# Altium PCB Mixer.PCBDOC
Units mil, origin at the board's own origin, x right, y up, seen from the top; angles counter-clockwise.
Board outline 8000 x 4000 mil, 2 copper layers (Top Layer, Bottom Layer); 97 components, 57 nets, 281 pads, 0 vias.
Unrouted connection lines stored in the file: 187.
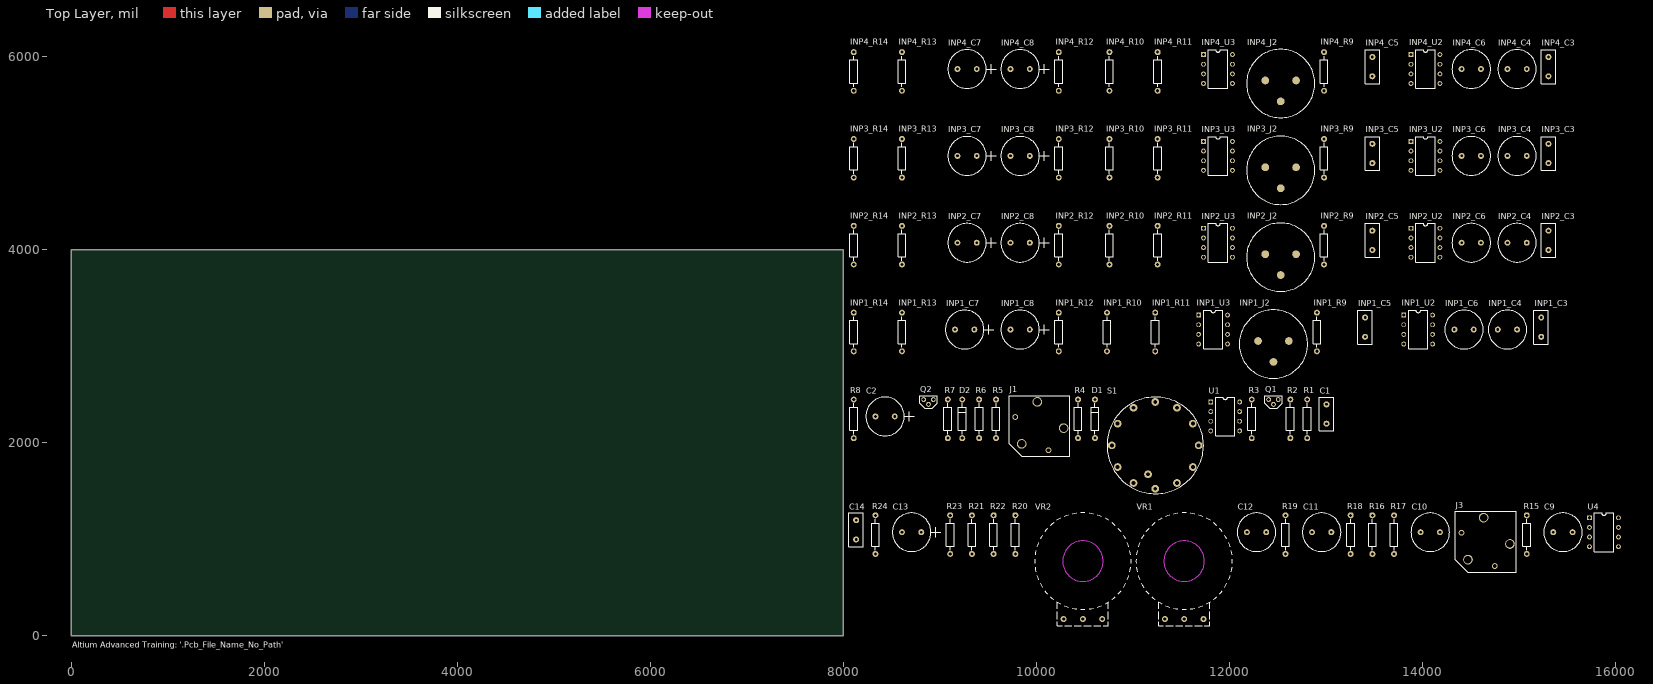
[diagram p0: Top Layer view]
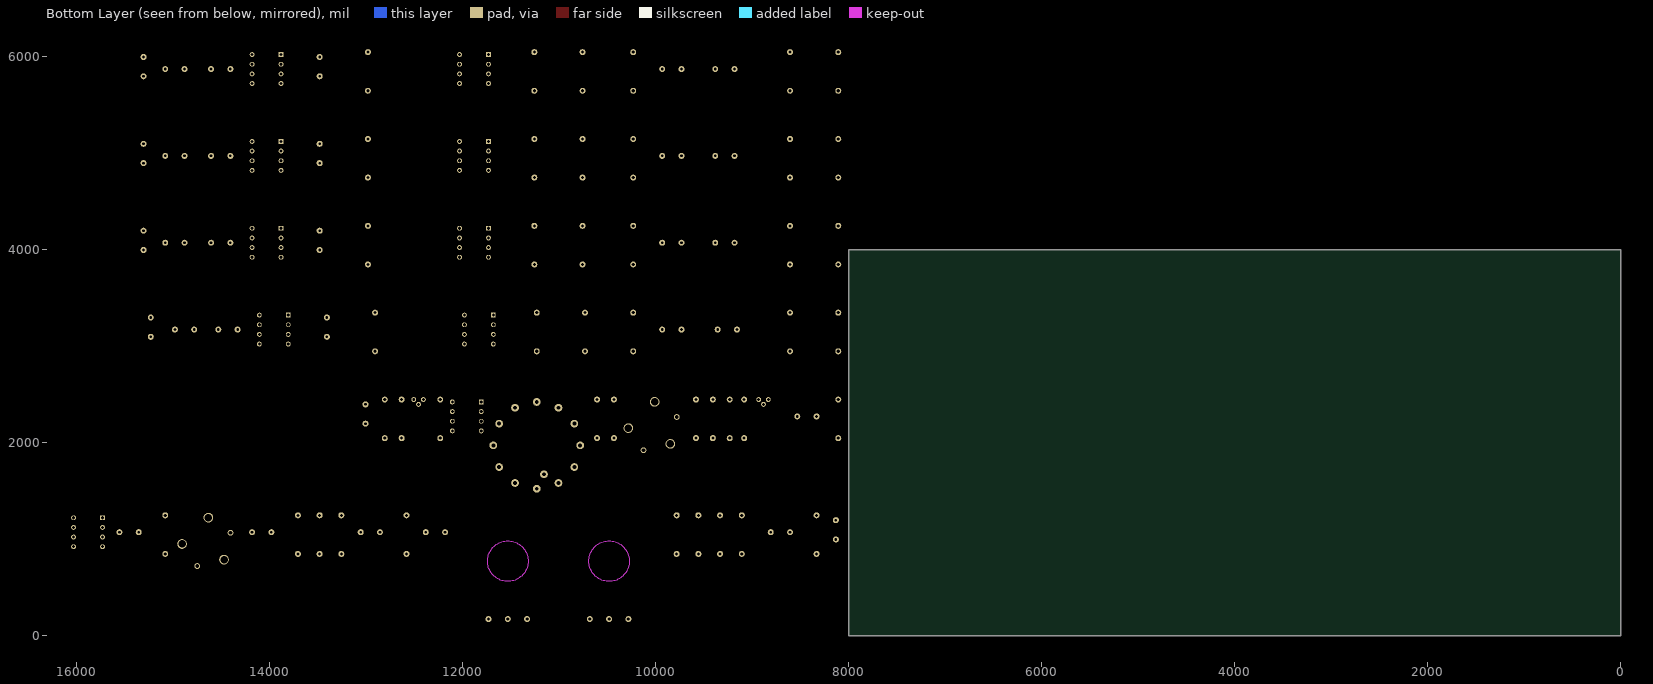
[diagram p1: Bottom Layer view, seen from below]

## Layer stack, top to bottom
Top Solder: solder mask 0.4, Solder Resist, Dk 3.5
Top Layer: signal copper 1.4
Dielectric 1: dielectric 12.6, FR-4, Dk 4.8
Bottom Layer: signal copper 1.4
Bottom Solder: solder mask 0.4, Solder Resist, Dk 3.5

## Board outline
0,0 8000,0 8000,3000 8000,4000 0,4000 0,0

## Design rules (kind name [scope] priority, off if disabled: settings)
Clearance [All] p1: gap=20 ignorepadtopadclearanceinfootprint=FALSE except(0: Arc-Hole Track-Hole SMDPad-Hole THPad-Hole Via-Hole Fill-Hole Poly-Hole Region-Hole Text-Hole)
PolygonConnect [All] p1: connectstyle=Relief reliefconductorwidth=10 reliefentries=4 polygonreliefangle="90 Angle" airgapwidth=10
RoomDefinition INP4 [InComponentClass('INP4')] p1: confinementstyle=ConfineIn formatcopy=TRUE lockcomponents=FALSE outline 8060,5350 15660,5350 15660,6200 8060,6200
RoomDefinition INP3 [InComponentClass('INP3')] p2: confinementstyle=ConfineIn formatcopy=TRUE lockcomponents=FALSE outline 8060,4450 15660,4450 15660,5300 8060,5300
RoomDefinition INP2 [InComponentClass('INP2')] p3: confinementstyle=ConfineIn formatcopy=TRUE lockcomponents=FALSE outline 8060,3550 15660,3550 15660,4400 8060,4400
RoomDefinition INP1 [InComponentClass('INP1')] p4: confinementstyle=ConfineIn formatcopy=TRUE lockcomponents=FALSE outline 8060,2650 15585,2650 15585,3500 8060,3500
RoomDefinition HP [InComponentClass('HP')] p5: confinementstyle=ConfineIn formatcopy=TRUE lockcomponents=FALSE outline 8060,1450 13110,1450 13110,2600 8060,2600
RoomDefinition AUX [InComponentClass('AUX')] p6: confinementstyle=ConfineIn formatcopy=TRUE lockcomponents=FALSE outline 8035,75 16085,75 16085,1400 8035,1400
RoutingVias [All] p1: holewidth=28 width=50 viastyle="Through Hole" minholewidth=28 minwidth=50 maxholewidth=28 maxwidth=50
SilkToBoardRegionClearance [All] p1 off:
SilkToSilkClearance [All] p1 off: silktosilkclearance=50
SilkToSolderMaskClearance [IsPad] p1: minsilkscreentomaskgap=100 clearancetoexposedcopper=TRUE
SolderMaskExpansion [All] p1: expansion=4 istentingtop=FALSE
SupplyNets "Schematic Supply Nets_2" [InNet('GND')] p1: voltage=0.000
SupplyNets "Schematic Supply Nets_1" [InNet('+15V')] p2: voltage=0.000
SupplyNets "Schematic Supply Nets" [InNet('-15V')] p3: voltage=0.000
Width [All] p1: maxlimit=30 minlimit=10 preferedwidth=20
27 further rules are at their usual default settings.

## Classes and differential pairs
channel class "Input channel": INP1 INP2 INP3 INP4
component class INP4: INP4_C3 INP4_C4 INP4_C5 INP4_C6 INP4_C7 INP4_C8 INP4_J2 INP4_R9 INP4_R10 INP4_R11 INP4_R12 INP4_R13 INP4_R14 INP4_U2 INP4_U3
component class INP3: INP3_C3 INP3_C4 INP3_C5 INP3_C6 INP3_C7 INP3_C8 INP3_J2 INP3_R9 INP3_R10 INP3_R11 INP3_R12 INP3_R13 INP3_R14 INP3_U2 INP3_U3
component class INP2: INP2_C3 INP2_C4 INP2_C5 INP2_C6 INP2_C7 INP2_C8 INP2_J2 INP2_R9 INP2_R10 INP2_R11 INP2_R12 INP2_R13 INP2_R14 INP2_U2 INP2_U3
component class INP1: INP1_C3 INP1_C4 INP1_C5 INP1_C6 INP1_C7 INP1_C8 INP1_J2 INP1_R9 INP1_R10 INP1_R11 INP1_R12 INP1_R13 INP1_R14 INP1_U2 INP1_U3
net class MB[1..2]: MB1 MB2
net class Headphone[1..4]: Headphone1 Headphone2 Headphone3 Headphone4
component class HP: C1 C2 D1 D2 J1 Q1 Q2 R1 R2 R3 R4 R5 R6 R7 R8 S1 U1
component class AUX: C9 C10 C11 C12 C13 C14 J3 R15 R16 R17 R18 R19 R20 R21 R22 R23 R24 U4 VR1 VR2

## Components (designator, comment, footprint, x,y, rotation, side; value= is the part's Value field where it differs from the comment)
C1 "22pF" RAD0.2 13010,2200 r90 top
C2 "10uF" RB.2/.4 8535,2275 r0 top
C9 "1uF" RB.2/.4-NP 15560,1075 r0 top
C10 "2.2uF" RB.2/.4-NP 14185,1075 r0 top
C11 "1uF" RB.2/.4-NP 13060,1075 r0 top
C12 "2.2uF" RB.2/.4-NP 12385,1075 r0 top
C13 "10uF" RB.2/.4 8810,1075 r0 top
C14 "270pF" RAD0.2 8135,1000 r90 top
D1 "1N914" DIODE0.4 10610,2050 r90 top
D2 "1N914" DIODE0.4 9235,2050 r90 top
INP1_C3 "10pF" RAD0.2 15235,3100 r90 top (schematic designator C3)
INP1_C4 "6.8uF" RB.2/.4-NP 14985,3175 r0 top (schematic designator C4)
INP1_C5 "270pF" RAD0.2 13410,3100 r90 top (schematic designator C5)
INP1_C6 "2.2uF" RB.2/.4-NP 14535,3175 r0 top (schematic designator C6)
INP1_C7 "10uF" RB.2/.4 9360,3175 r0 top (schematic designator C7)
INP1_C8 "10uF" RB.2/.4 9935,3175 r0 top (schematic designator C8)
INP1_J2 "XLR" XLR-FEMALE 12460,3025 r0 top (schematic designator J2)
INP1_R9 "15k" AXIAL0.4 12910,2950 r90 top (schematic designator R9)
INP1_R10 "10k" AXIAL0.4 10735,2950 r90 top (schematic designator R10)
INP1_R11 "10k" AXIAL0.4 11235,2950 r90 top (schematic designator R11)
INP1_R12 "15k" AXIAL0.4 10235,2950 r90 top (schematic designator R12)
INP1_R13 "10k" AXIAL0.4 8610,2950 r90 top (schematic designator R13)
INP1_R14 "10k" AXIAL0.4 8110,2950 r90 top (schematic designator R14)
INP1_U2 "OP27C" DIP8 13810,3325 r0 top (schematic designator U2)
INP1_U3 "SSM2017P (8)" DIP8 11685,3325 r0 top (schematic designator U3)
INP2_C3 "10pF" RAD0.2 15310,4000 r90 top (schematic designator C3)
INP2_C4 "6.8uF" RB.2/.4-NP 15085,4075 r0 top (schematic designator C4)
INP2_C5 "270pF" RAD0.2 13485,4000 r90 top (schematic designator C5)
INP2_C6 "2.2uF" RB.2/.4-NP 14610,4075 r0 top (schematic designator C6)
INP2_C7 "10uF" RB.2/.4 9385,4075 r0 top (schematic designator C7)
INP2_C8 "10uF" RB.2/.4 9935,4075 r0 top (schematic designator C8)
INP2_J2 "XLR" XLR-FEMALE 12535,3925 r0 top (schematic designator J2)
INP2_R9 "15k" AXIAL0.4 12985,3850 r90 top (schematic designator R9)
INP2_R10 "10k" AXIAL0.4 10760,3850 r90 top (schematic designator R10)
INP2_R11 "10k" AXIAL0.4 11260,3850 r90 top (schematic designator R11)
INP2_R12 "15k" AXIAL0.4 10235,3850 r90 top (schematic designator R12)
INP2_R13 "10k" AXIAL0.4 8610,3850 r90 top (schematic designator R13)
INP2_R14 "10k" AXIAL0.4 8110,3850 r90 top (schematic designator R14)
INP2_U2 "OP27C" DIP8 13885,4225 r0 top (schematic designator U2)
INP2_U3 "SSM2017P (8)" DIP8 11735,4225 r0 top (schematic designator U3)
INP3_C3 "10pF" RAD0.2 15310,4900 r90 top (schematic designator C3)
INP3_C4 "6.8uF" RB.2/.4-NP 15085,4975 r0 top (schematic designator C4)
INP3_C5 "270pF" RAD0.2 13485,4900 r90 top (schematic designator C5)
INP3_C6 "2.2uF" RB.2/.4-NP 14610,4975 r0 top (schematic designator C6)
INP3_C7 "10uF" RB.2/.4 9385,4975 r0 top (schematic designator C7)
INP3_C8 "10uF" RB.2/.4 9935,4975 r0 top (schematic designator C8)
INP3_J2 "XLR" XLR-FEMALE 12535,4825 r0 top (schematic designator J2)
INP3_R9 "15k" AXIAL0.4 12985,4750 r90 top (schematic designator R9)
INP3_R10 "10k" AXIAL0.4 10760,4750 r90 top (schematic designator R10)
INP3_R11 "10k" AXIAL0.4 11260,4750 r90 top (schematic designator R11)
INP3_R12 "15k" AXIAL0.4 10235,4750 r90 top (schematic designator R12)
INP3_R13 "10k" AXIAL0.4 8610,4750 r90 top (schematic designator R13)
INP3_R14 "10k" AXIAL0.4 8110,4750 r90 top (schematic designator R14)
INP3_U2 "OP27C" DIP8 13885,5125 r0 top (schematic designator U2)
INP3_U3 "SSM2017P (8)" DIP8 11735,5125 r0 top (schematic designator U3)
INP4_C3 "10pF" RAD0.2 15310,5800 r90 top (schematic designator C3)
INP4_C4 "6.8uF" RB.2/.4-NP 15085,5875 r0 top (schematic designator C4)
INP4_C5 "270pF" RAD0.2 13485,5800 r90 top (schematic designator C5)
INP4_C6 "2.2uF" RB.2/.4-NP 14610,5875 r0 top (schematic designator C6)
INP4_C7 "10uF" RB.2/.4 9385,5875 r0 top (schematic designator C7)
INP4_C8 "10uF" RB.2/.4 9935,5875 r0 top (schematic designator C8)
INP4_J2 "XLR" XLR-FEMALE 12535,5725 r0 top (schematic designator J2)
INP4_R9 "15k" AXIAL0.4 12985,5650 r90 top (schematic designator R9)
INP4_R10 "10k" AXIAL0.4 10760,5650 r90 top (schematic designator R10)
INP4_R11 "10k" AXIAL0.4 11260,5650 r90 top (schematic designator R11)
INP4_R12 "15k" AXIAL0.4 10235,5650 r90 top (schematic designator R12)
INP4_R13 "10k" AXIAL0.4 8610,5650 r90 top (schematic designator R13)
INP4_R14 "10k" AXIAL0.4 8110,5650 r90 top (schematic designator R14)
INP4_U2 "OP27C" DIP8 13885,6025 r0 top (schematic designator U2)
INP4_U3 "SSM2017P (8)" DIP8 11735,6025 r0 top (schematic designator U3)
J1 "Headphone" JACK-6.25MM 10035,2175 r0 top
J3 "Auxilary In" JACK-6.25MM 14660,975 r0 top
Q1 "BC338-25" TO-92A 12410,2450 r0 top
Q2 "BC328-25" TO-92A 8835,2450 r0 top
R1 "68k" AXIAL0.4 12810,2050 r90 top
R2 "10k" AXIAL0.4 12635,2050 r90 top
R3 "33R" AXIAL0.4 12235,2050 r90 top
R4 "10k" AXIAL0.4 10435,2050 r90 top
R5 "68R" AXIAL0.4 9585,2050 r90 top
R6 "33R" AXIAL0.4 9410,2050 r90 top
R7 "22k" AXIAL0.4 9085,2050 r90 top
R8 "10k" AXIAL0.4 8110,2050 r90 top
R15 "10R" AXIAL0.4 15085,850 r90 top
R16 "15k" AXIAL0.4 13485,850 r90 top
R17 "15k" AXIAL0.4 13710,850 r90 top
R18 "22k" AXIAL0.4 13260,850 r90 top
R19 "10R" AXIAL0.4 12585,850 r90 top
R20 "22k" AXIAL0.4 9785,850 r90 top
R21 "15k" AXIAL0.4 9335,850 r90 top
R22 "15k" AXIAL0.4 9560,850 r90 top
R23 "6.8k" AXIAL0.4 9110,850 r90 top
R24 "2.2k" AXIAL0.4 8335,850 r90 top
S1 "SW-12WAY" SW-12WAY 11235,1975 r0 top
U1 "TL071" DIP8 11810,2425 r0 top
U4 "LM833M" DIP8 15735,1225 r0 top
VR1 "10k LOG" "POT - 24MM" 11535,775 r0 top
VR2 "10k LIN" "POT - 24MM" 10485,775 r0 top

## Footprints (in the part's own frame and the unit in brackets; to place one, negate y for a bottom-side part, rotate by r counter-clockwise, add the part's x,y. Pads: shape width x height; smd on the part's side, far side on the other; paste and mask are expansions set on the pad)
AXIAL0.4 [mil]
  round 62 hole 32: 1(0,0) 2(400,0)
  silkscreen extent 40,-40 360,40
DIODE0.4 [mil]
  round 62 hole 32: 1(0,0) 2(400,0)
  silkscreen extent 40,-40 360,40
DIP8 [mil]
  rect 50x50 hole 32: 1(0,0)
  round 50 hole 32: 2(0,-100) 3(0,-200) 4(0,-300) 5(300,-300) 6(300,-200) 7(300,-100) 8(300,0)
  silkscreen extent 50,-350 250,50
JACK-6.25MM [mil]
  round 60 hole 39: 0(-251,94) 0(94,-251)
  round 100 hole 78: 1(251,-22) 2(-22,251) 3(-184,-184)
  silkscreen extent -315,-315 315,315
"POT - 24MM" [mil]
  round 62 hole 35: 1(-200,-600) 2(0,-600) 3(200,-600)
  round 50 hole 236.22 unplated: MNT(0,0)
  Keep-Out Layer circle w10: c0,0 r210
  silkscreen extent -500,-670 500,500
RAD0.2 [mil]
  round 62 hole 28: 1(0,0) 2(200,0)
  silkscreen extent -75,-75 275,75
RB.2/.4 [mil]
  round 62 hole 28: 1(0,0) 2(-200,0)
  silkscreen extent -300,-200 200,200
RB.2/.4-NP [mil]
  round 62 hole 28: 1(0,0) 2(-200,0)
  silkscreen extent -300,-200 100,200
SW-12WAY [mil]
  round 80 hole 40: 1(225,389.71) 2(389.71,225) 3(450,0) 4(389.71,-225) 5(225,-389.71) 6(0,-450) 7(-225,-389.71) 8(-389.71,-225) 9(-450,0) 10(-389.71,225) 11(-225,389.71) 12(0,450) 13(-75,-300)
  silkscreen extent -500,-500 500,500
TO-92A [mil]
  round 50 hole 30: 1(0,0) 2(50,-50) 3(100,0)
  silkscreen extent -40,-90 140,40
XLR-FEMALE [mm]
  round 2.032 smd: 1(-4.05,0.8) 2(4.05,0.8) 3(0,-4.7)
  silkscreen extent -9,-9 9,9

## Part data
C1 C9 C10 C11 C12 C14 INP1_C3 INP1_C4 INP1_C5 INP1_C6 INP2_C3 INP2_C4 INP2_C5 INP2_C6 INP3_C3 INP3_C4 INP3_C5 INP3_C6 INP4_C3 INP4_C4 INP4_C5 INP4_C6: library part CAP, "Capacitor"
C2 C13 INP1_C7 INP1_C8 INP2_C7 INP2_C8 INP3_C7 INP3_C8 INP4_C7 INP4_C8: library part "CAPACITOR POL", "Bi-Polar Capacitor"
D1 D2: "Diode"
INP1_J2 INP2_J2 INP3_J2 INP4_J2: "XLR connector, PCB mounted"
INP1_R9 INP1_R10 INP1_R11 INP1_R12 INP1_R13 INP1_R14 INP2_R9 INP2_R10 INP2_R11 INP2_R12 INP2_R13 INP2_R14 INP3_R9 INP3_R10 INP3_R11 INP3_R12 INP3_R13 INP3_R14 INP4_R9 INP4_R10 INP4_R11 INP4_R12 INP4_R13 INP4_R14 R1 R2 R3 R4 R5 R6 R7 R8 R15 R16 R17 R18 R19 R20 R21 R22 R23 R24: library part RES1, "Resistor"
INP1_U2 INP2_U2 INP3_U2 INP4_U2: "Low Noise, High Speed Precision Operational Amplifier"
INP1_U3 INP2_U3 INP3_U3 INP4_U3: "Self-Contained Audio Preamplifier"
J1 J3: library part "PHONEJACK MONO"
Q1: "NPN BJT"
Q2: "PNP BJT"
U1: "Low-Noise  JFET-Input Operational Amplifiers"
U4: "Fast Settling Dual Operational Amplifier"
VR1 VR2: library part POT1, "Potentiometer"

## Nets (pads, with @x,y where several pads share a name; then routed paths per layer and width w, separated by ;. In a path a pad name is that pad's centre, name@x,y a point inside that pad or via, vN(x,y) a via of type N, cw(c..) or ccw(c..) an arc to the next point about the centre after c; other vN are vias at no path point)
+15V: C2.1 C13.1 INP1_C7.1 INP1_C8.1 INP1_U2.7 INP1_U3.7 INP2_C7.1 INP2_C8.1 INP2_U2.7 INP2_U3.7 INP3_C7.1 INP3_C8.1 INP3_U2.7 INP3_U3.7 INP4_C7.1 INP4_C8.1 INP4_U2.7 INP4_U3.7 Q1.1 R2.2 U1.7 U4.4
-15V: C2.2 C13.2 INP1_C7.2 INP1_C8.2 INP1_U2.4 INP1_U3.4 INP2_C7.2 INP2_C8.2 INP2_U2.4 INP2_U3.4 INP3_C7.2 INP3_C8.2 INP3_U2.4 INP3_U3.4 INP4_C7.2 INP4_C8.2 INP4_U2.4 INP4_U3.4 Q2.1 R8.1 U1.4 U4.8
GND: INP1_J2.1 INP1_R10.1 INP1_R11.1 INP1_R14.1 INP1_U2.3 INP1_U3.5 INP2_J2.1 INP2_R10.1 INP2_R11.1 INP2_R14.1 INP2_U2.3 INP2_U3.5 INP3_J2.1 INP3_R10.1 INP3_R11.1 INP3_R14.1 INP3_U2.3 INP3_U3.5 INP4_J2.1 INP4_R10.1 INP4_R11.1 INP4_R14.1 INP4_U2.3 INP4_U3.5 J1.3 J3.3 R7.1 R18.1 R20.1 R24.2 VR1.3 VR2.2
Headphone: INP1_R13.2 INP2_R13.2 INP3_R13.2 INP4_R13.2
Headphone1: S1.8
Headphone2: S1.7
Headphone3: S1.6
Headphone4: S1.5
MB1: INP1_R9.2 INP2_R9.2 INP3_R9.2 INP4_R9.2 R17.2 S1.11
MB2: INP1_R12.2 INP2_R12.2 INP3_R12.2 INP4_R12.2 R22.2 S1.12
NetC1_1: C1.1 R1.1 R4.2 U1.2
NetC1_2: C1.2 R1.2 R3.1 R5.1 R6.2
NetC9_1: C9.1 J3.1
NetC9_2: C9.2 R15.1 R18.2
NetC10_1: C10.1 U4.1 U4.2
NetC10_2: C10.2 VR1.1
NetC11_1: C11.1 VR1.2
NetC11_2: C11.2 R19.1 R20.2
NetC12_1: C12.1 C14.2 R23.1 U4.7
NetC12_2: C12.2 R16.1 R21.1
NetC14_1: C14.1 R23.2 R24.1 U4.6
NetD1_1: D1.1 Q1.2 R2.1
NetD1_2: D1.2 D2.1 U1.6
NetD2_2: D2.2 Q2.2 R8.2
NetINP1_C3_1: INP1_C3.1 INP1_C4.2 INP1_U2.2
NetINP1_C3_2: INP1_C3.2 INP1_C6.1 INP1_U2.6
NetINP1_C4_1: INP1_C4.1 INP1_U3.6
NetINP1_C5_1: INP1_C5.1 INP1_J2.2 INP1_R10.2 INP1_U3.2
NetINP1_C5_2: INP1_C5.2 INP1_J2.3 INP1_R11.2 INP1_U3.3
NetINP1_C6_2: INP1_C6.2 INP1_R9.1 INP1_R12.1 INP1_R13.1 INP1_R14.2
NetINP2_C3_1: INP2_C3.1 INP2_C4.2 INP2_U2.2
NetINP2_C3_2: INP2_C3.2 INP2_C6.1 INP2_U2.6
NetINP2_C4_1: INP2_C4.1 INP2_U3.6
NetINP2_C5_1: INP2_C5.1 INP2_J2.2 INP2_R10.2 INP2_U3.2
NetINP2_C5_2: INP2_C5.2 INP2_J2.3 INP2_R11.2 INP2_U3.3
NetINP2_C6_2: INP2_C6.2 INP2_R9.1 INP2_R12.1 INP2_R13.1 INP2_R14.2
NetINP3_C3_1: INP3_C3.1 INP3_C4.2 INP3_U2.2
NetINP3_C3_2: INP3_C3.2 INP3_C6.1 INP3_U2.6
NetINP3_C4_1: INP3_C4.1 INP3_U3.6
NetINP3_C5_1: INP3_C5.1 INP3_J2.2 INP3_R10.2 INP3_U3.2
NetINP3_C5_2: INP3_C5.2 INP3_J2.3 INP3_R11.2 INP3_U3.3
NetINP3_C6_2: INP3_C6.2 INP3_R9.1 INP3_R12.1 INP3_R13.1 INP3_R14.2
NetINP4_C3_1: INP4_C3.1 INP4_C4.2 INP4_U2.2
NetINP4_C3_2: INP4_C3.2 INP4_C6.1 INP4_U2.6
NetINP4_C4_1: INP4_C4.1 INP4_U3.6
NetINP4_C5_1: INP4_C5.1 INP4_J2.2 INP4_R10.2 INP4_U3.2
NetINP4_C5_2: INP4_C5.2 INP4_J2.3 INP4_R11.2 INP4_U3.3
NetINP4_C6_2: INP4_C6.2 INP4_R9.1 INP4_R12.1 INP4_R13.1 INP4_R14.2
NetJ1_1: J1.1 R5.2
NetQ1_3: Q1.3 R3.2
NetQ2_3: Q2.3 R6.1
NetR4_1: R4.1 S1.13
NetR7_2: R7.2 U1.3
NetR15_2: R15.2 U4.3
NetR16_2: R16.2 R17.1 VR2.1
NetR19_2: R19.2 U4.5
NetR21_2: R21.2 R22.1 VR2.3
pads on no net: INP1_U2.1 INP1_U2.5 INP1_U2.8 INP1_U3.1 INP1_U3.8 INP2_U2.1 INP2_U2.5 INP2_U2.8 INP2_U3.1 INP2_U3.8 INP3_U2.1 INP3_U2.5 INP3_U2.8 INP3_U3.1 INP3_U3.8 INP4_U2.1 INP4_U2.5 INP4_U2.8 INP4_U3.1 INP4_U3.8 J1.0 J1.2 J3.0 J3.2 S1.1 S1.2 S1.3 S1.4 S1.9 S1.10 U1.1 U1.5 U1.8 VR1.MNT VR2.MNT

## Silkscreen, mask and mechanical layers (free items; w line width, h text height)
Top Overlay:
  text "Altium Advanced Training: '.Pcb_File_Name_No_Path'" at 10,-120.01 h60